# Altium PCB Prijemnik.PcbDoc
Units mm, origin at the board's own origin, x right, y up, seen from the top; angles counter-clockwise.
Board outline 152.4 x 101.6 mm, 2 copper layers (Top Layer, Bottom Layer); 40 components, 33 nets, 155 pads, 14 vias.
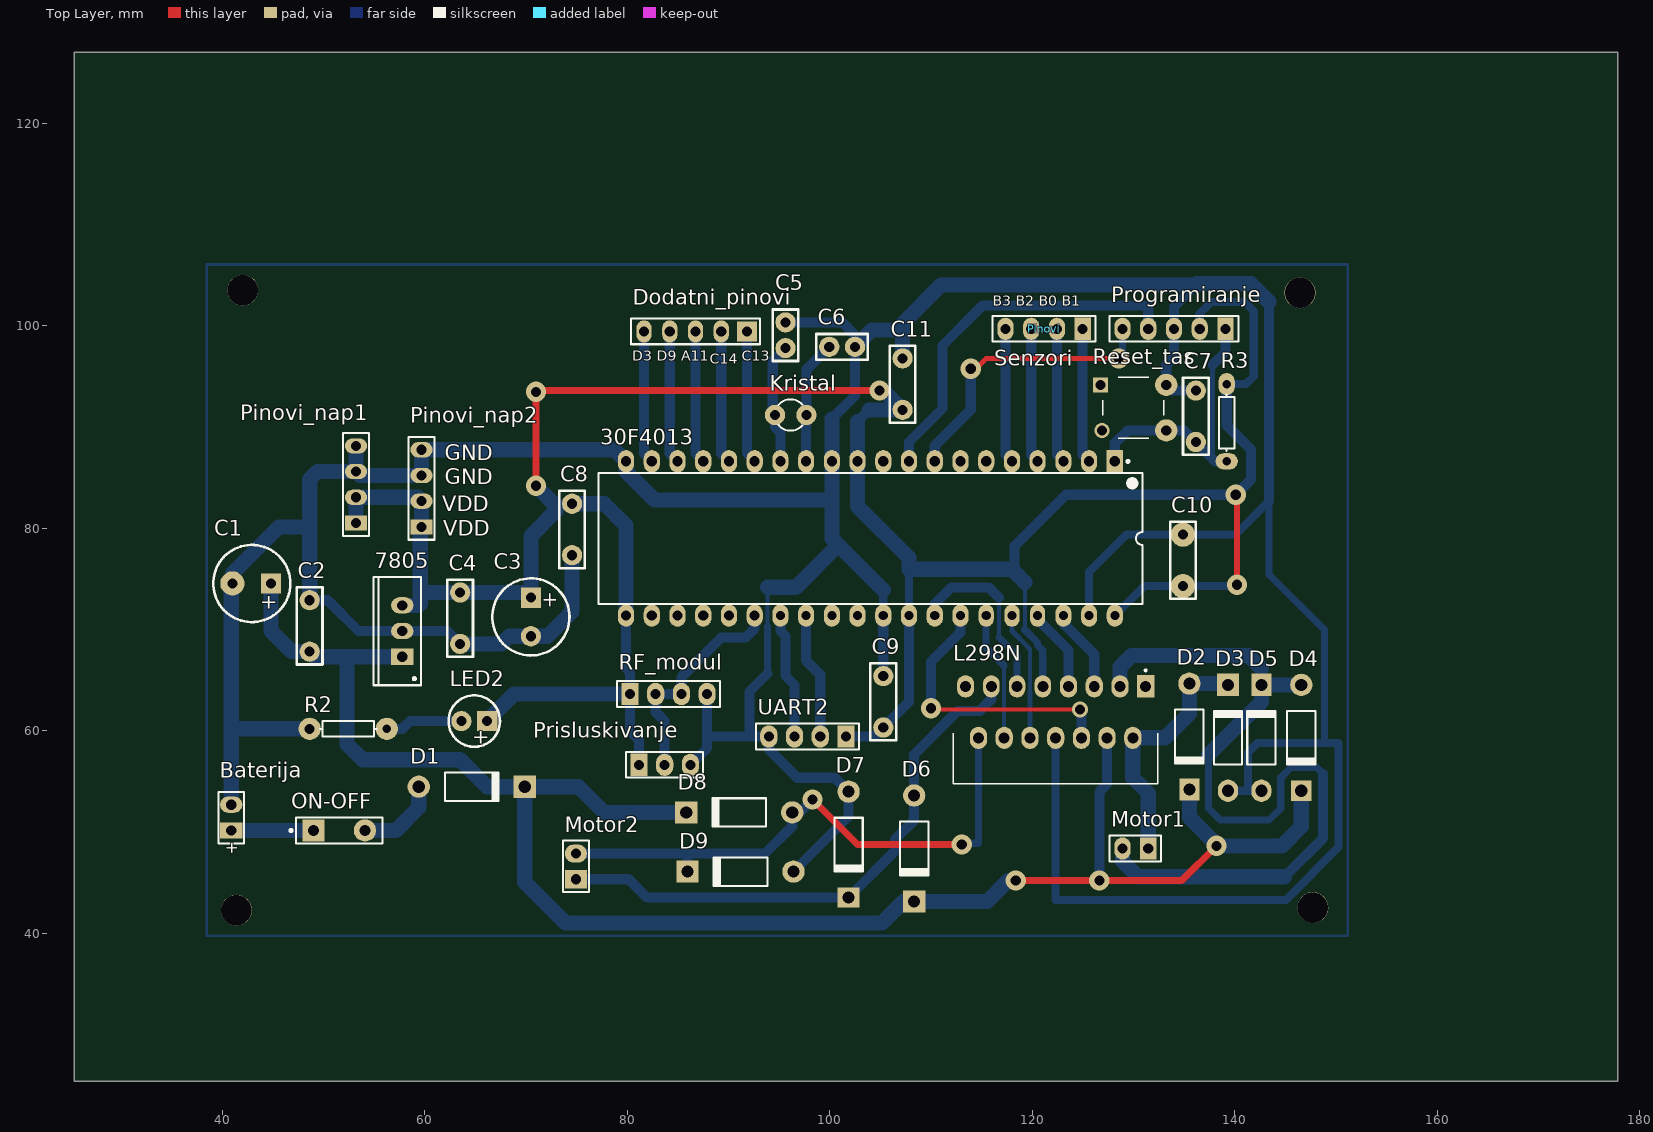
[diagram p0: Top Layer view]
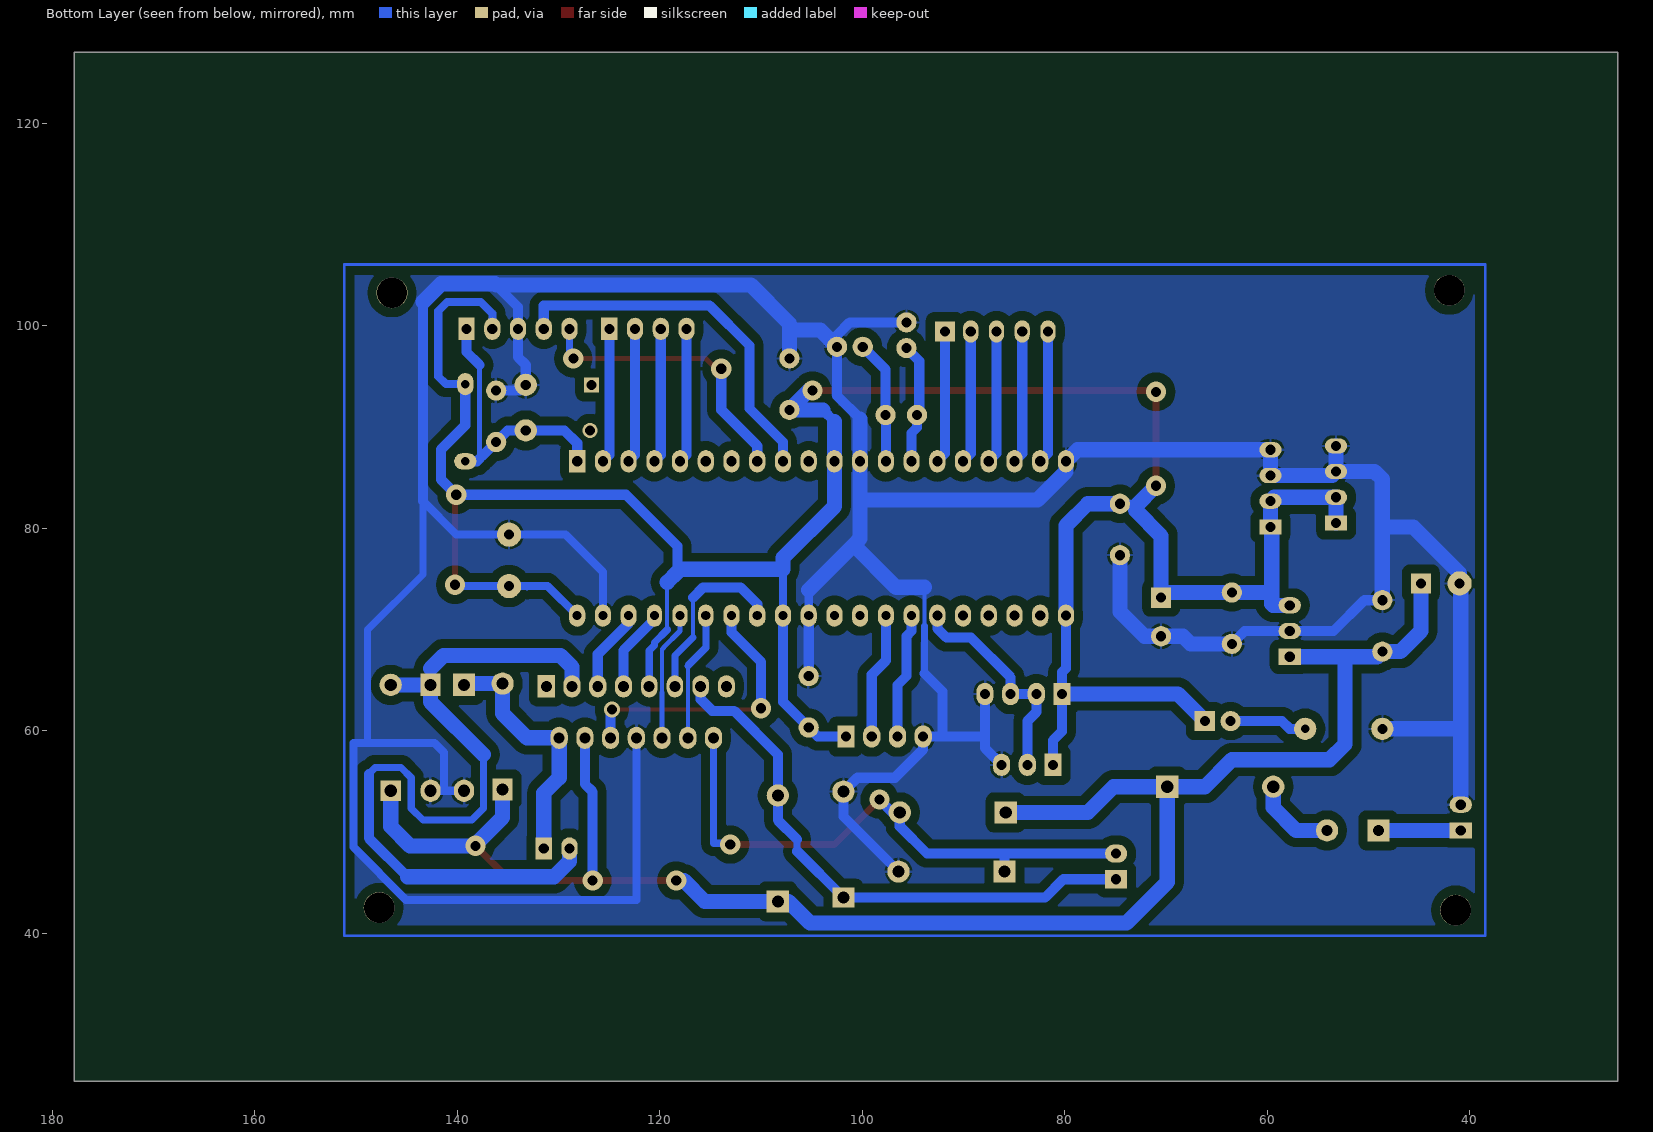
[diagram p1: Bottom Layer view, seen from below]

## Layer stack, top to bottom
Top Solder: solder mask 0.0102, Solder Resist, Dk 3.5
Top Layer: signal copper 0.0356
Dielectric 1: dielectric 0.32, FR-4, Dk 4.8
Bottom Layer: signal copper 0.0356
Bottom Solder: solder mask 0.0102, Solder Resist, Dk 3.5

## Board outline
25.4,25.4 177.8,25.4 177.8,127 25.4,127

## Design rules (kind name [scope] priority, off if disabled: settings)
Clearance [All vs InPolygon] p1: gap=0.9 ignorepadtopadclearanceinfootprint=FALSE
PolygonConnect [All] p1: connectstyle=Relief reliefconductorwidth=0.254 reliefentries=4 polygonreliefangle="90 Angle" airgapwidth=0.254
RoutingVias [All] p1: holewidth=0.711 width=1.27 viastyle="Through Hole" minholewidth=0.711 minwidth=1.27 maxholewidth=0.711 maxwidth=1.27
SolderMaskExpansion [All] p1: expansion=0.102
Width Signali [InNetClass('Ostali Signali')] p1: maxlimit=1 minlimit=0.3 preferedwidth=0.8
Width VDD [InNetClass('VDD i GND')] p2: maxlimit=1.5 minlimit=0.4 preferedwidth=1
Width Motor [InNetClass('Napajanje_motora')] p3: maxlimit=2 minlimit=0.4 preferedwidth=1
30 further rules are at their usual default settings.

## Classes and differential pairs
net class Napajanje_motora: NetBaterija_1 NetD1_1 NetD2_1 NetD4_1 NetD6_1 NetD8_1 V_motora
net class "VDD i GND": GND VDD
net class "Ostali Signali": MCLR Net30F4013_33 Net30F4013_34 NetLED2_2 OSC1 OSC2 PGC PGD RA11 RB0 RB1 RB2 RB3 RB9 RB10 RB11 RB12 RC13 RC14 RD3 RD9 RF4 RF5 U1RX/RF2

## Components (designator, comment, footprint, x,y, rotation, side; value= is the part's Value field where it differs from the comment)
30F4013 "DSPIC30F4013-20E/P" PDIP600-P40 104.013,78.994 r270 top
7805 "LM7805CT" T03B 57.785,69.85 r90 top
Baterija "9V" BAT-2 40.894,51.435 r90 top
C1 "470uF" "El. Kondenzator 470uf"#1 42.926,74.549 r180 top
C2 "100nF" "C blok 100n"#1 48.641,70.358 r90 top
C3 "470uF" "El. Kondenzator 470uf"#2 70.485,71.247 r270 top
C4 "100nF" "C blok 100n"#1 63.5,71.12 r270 top
C5 "33pF" "C keramicki 30pF" 95.631,99.06 r270 top
C6 "33pF" "C keramicki 30pF" 101.219,97.917 r180 top
C7 "100nF" "C blok 100n"#1 136.144,91.059 r90 top
C8 "100nF" "C blok 100n"#1 74.549,79.883 r270 top
C9 "100nF" "C blok 100n"#1 105.283,62.865 r90 top
C10 "100nF" "C blok 100n"#2 134.874,76.835 r90 top
C11 "100nF" "C blok 100n"#1 107.188,94.234 r90 top
D1 "1N4007" DO-41#1 64.643,54.483 r0 top
D2 "Diode 1N4007" DO-41#2 135.509,59.436 r270 top
D3 "Diode 1N4007" DO-41#3 139.319,59.309 r90 top
D4 "Diode 1N4007" DO-41#4 146.558,59.309 r270 top
D5 "Diode 1N4007" DO-41#5 142.621,59.309 r90 top
D6 "Diode 1N4007" DO-41#1 108.331,48.387 r270 top
D7 "Diode 1N4007" DO-41#6 101.854,48.768 r270 top
D8 "Diode 1N4007" DO-41#1 91.059,51.943 r180 top
D9 "Diode 1N4007" DO-41#1 91.186,46.101 r180 top
Dodatni_pinovi "Pinovi" HDR1X5#1 91.821,99.441 r180 top
Kristal "10MHz" R38 96.139,91.186 r270 top
L298N "L298N" *TO127P2020X500X2100-15 131.191,64.389 r270 top
LED2 "LED_regulatora" LED_5mm 64.897,60.96 r180 top
Motor1 "M1" HDR1X2#1 131.445,48.387 r180 top
Motor2 "M2" HDR1X2#2 74.93,45.339 r90 top
ON-OFF "Prekidac" SPST-2 51.562,50.165 r0 top
Pinovi "Senzori" HDR1X4#1 124.968,99.695 r180 top
Pinovi_nap1 "Napajanje" HDR1X4#2 53.213,80.518 r90 top
Pinovi_nap2 "Napajanje" HDR1X4#2 59.69,80.137 r90 top
Prisluskivanje "Rx_na_Rx_MAX-a" HDR1X3 81.153,56.642 r0 top
Programiranje "Pinovi" HDR1X5#2 139.065,99.695 r180 top
R2 "660" AXIAL-0.3#1 52.451,60.198 r0 top
R3 "10k" AXIAL-0.3#2 139.192,90.424 r90 top value=10K
Reset_tas "3-1825910-1" *TE_3-1825910-1 129.973,91.912 r0 top
RF_modul "Prijem" HDR1X4#3 80.264,63.627 r0 top
UART2 "Bluetooth" HDR1X4#4 101.6,59.436 r180 top

## Footprints (in the part's own frame and the unit in brackets; to place one, negate y for a bottom-side part, rotate by r counter-clockwise, add the part's x,y. Pads: shape width x height; smd on the part's side, far side on the other; paste and mask are expansions set on the pad)
*TE_3-1825910-1 [mm]
  rect 1.498x1.498 hole 0.99: 1(-3.25,2.25)
  round 2.2 hole 1: 2(3.25,2.25) 4(3.25,-2.25)
  round 1.498 hole 0.99: 3(-3.1,-2.25)
  silkscreen extent -3,-3 3,3
*TO127P2020X500X2100-15 [mm]
  rect 2.2x1.7 hole 1.08: 1(0,0)
  oval 2.2x1.7 hole 1.08: 2(5.08,-1.27) 3(0,-2.54) 4(5.08,-3.81) 5(0,-5.08) 6(5.08,-6.35) 7(0,-7.62) 8(5.08,-8.89) 10(5.08,-11.43) 12(5.08,-13.97) 14(5.08,-16.51) 15(0,-17.78)
  oval 2.2x1.62 hole 1.08: 9(0,-10.16) 11(0,-12.7) 13(0,-15.24)
  silkscreen extent -1.69,-18.99 9.63,1.21
AXIAL-0.3#1 [mm] "Axial Device, Thru-Hole; 2 Leads; 0.3 in Pin Spacing"
  round 2.2 hole 1: 1(-3.81,0)
  round 2.2 hole 0.85: 2(3.81,0)
  silkscreen extent -2.77,-0.76 2.77,0.76
AXIAL-0.3#2 [mm] "Axial Device, Thru-Hole; 2 Leads; 0.3 in Pin Spacing"
  oval 1.6x2.2 hole 0.85: 1(-3.81,0)
  oval 2.2x1.6 hole 0.85: 2(3.81,0)
  silkscreen extent -2.77,-0.76 2.77,0.76
BAT-2 [mm] "Battery; 2 Leads"
  rect 1.6x2.2 hole 1: 1(-1.27,0)
  oval 1.6x2.2 hole 1: 2(1.27,0)
  silkscreen extent -2.54,-1.27 2.54,1.27
"C blok 100n"#1 [mm]
  round 2 hole 1: 1(2.54,0) 2(-2.54,0)
  silkscreen extent -3.81,-1.27 3.81,1.27
"C blok 100n"#2 [mm]
  round 2.4 hole 1: 1(2.54,0) 2(-2.54,0)
  silkscreen extent -3.81,-1.27 3.81,1.27
"C keramicki 30pF" [mm]
  round 2 hole 1: 1(-1.27,0) 2(1.27,0)
  silkscreen extent -2.54,-1.27 2.54,1.27
DO-41#1 [mm] "Diode, Axial; Body 5.2 x 2.7 mm (LxDia. max), Lead Dia. 0.86 mm (max)"
  round 2.2 hole 1.2: 1(-5.23,0)
  rect 2.2x2.2 hole 1.2: 2(5.23,0)
  silkscreen extent -2.65,-1.4 2.75,1.4
DO-41#2 [mm] "Diode, Axial; Body 5.2 x 2.7 mm (LxDia. max), Lead Dia. 0.86 mm (max)"
  round 2.2 hole 1.2: 1(-5.23,0)
  rect 2.2x2 hole 1.2: 2(5.23,0)
  silkscreen extent -2.65,-1.4 2.75,1.4
DO-41#3 [mm] "Diode, Axial; Body 5.2 x 2.7 mm (LxDia. max), Lead Dia. 0.86 mm (max)"
  oval 2.2x2 hole 1.2: 1(-5.23,0)
  rect 2.2x2.2 hole 1.2: 2(5.23,0)
  silkscreen extent -2.65,-1.4 2.75,1.4
DO-41#4 [mm] "Diode, Axial; Body 5.2 x 2.7 mm (LxDia. max), Lead Dia. 0.86 mm (max)"
  round 2.2 hole 1.2: 1(-5.23,0)
  rect 2x2 hole 1.2: 2(5.23,0)
  silkscreen extent -2.65,-1.4 2.75,1.4
DO-41#5 [mm] "Diode, Axial; Body 5.2 x 2.7 mm (LxDia. max), Lead Dia. 0.86 mm (max)"
  oval 2.2x2 hole 1.2: 1(-5.23,0)
  rect 2.2x2 hole 1.2: 2(5.23,0)
  silkscreen extent -2.65,-1.4 2.75,1.4
DO-41#6 [mm] "Diode, Axial; Body 5.2 x 2.7 mm (LxDia. max), Lead Dia. 0.86 mm (max)"
  round 2.2 hole 1.2: 1(-5.23,0)
  rect 2x2.2 hole 1.2: 2(5.23,0)
  silkscreen extent -2.65,-1.4 2.75,1.4
"El. Kondenzator 470uf"#1 [mm]
  rect 2x2 hole 1: 1(-1.905,0)
  round 2.4 hole 1: 2(1.905,0)
  silkscreen extent -3.81,-3.81 3.81,3.81
"El. Kondenzator 470uf"#2 [mm]
  rect 2x2 hole 1: 1(-1.905,0)
  round 2 hole 1: 2(1.905,0)
  silkscreen extent -3.81,-3.81 3.81,3.81
HDR1X2#1 [mm] "Connector; Header; 2 Position"
  rect 1.6x2.2 hole 1: 1(0,0)
  oval 1.6x2.2 hole 1: 2(2.54,0)
  silkscreen extent -1.27,-1.27 3.81,1.27
HDR1X2#2 [mm] "Connector; Header; 2 Position"
  rect 1.8x2.2 hole 1: 1(0,0)
  oval 1.8x2.2 hole 1: 2(2.54,0)
  silkscreen extent -1.27,-1.27 3.81,1.27
HDR1X3 [mm] "Connector; Header; 3 Position"
  rect 1.7x2.2 hole 1 unplated: 1(0,0)
  oval 1.7x2.2 hole 1 unplated: 2(2.54,0) 3(5.08,0)
  silkscreen extent -1.27,-1.27 6.35,1.27
HDR1X4#1 [mm] "Connector; Header; 4 Position"
  rect 1.6x2.2 hole 1: 1(0,0)
  oval 1.6x2.2 hole 1: 2(2.54,0) 3(5.08,0) 4(7.62,0)
  silkscreen extent -1.27,-1.27 8.89,1.27
HDR1X4#2 [mm] "Connector; Header; 4 Position"
  rect 1.5x2.2 hole 1: 1(0,0)
  oval 1.5x2.2 hole 1: 2(2.54,0) 3(5.08,0) 4(7.62,0)
  silkscreen extent -1.27,-1.27 8.89,1.27
HDR1X4#3 [mm] "Connector; Header; 4 Position"
  rect 1.7x2.2 hole 1 unplated: 1(0,0)
  oval 1.7x2.2 hole 1 unplated: 2(2.54,0) 3(5.08,0) 4(7.62,0)
  silkscreen extent -1.27,-1.27 8.89,1.27
HDR1X4#4 [mm] "Connector; Header; 4 Position"
  rect 1.7x2.2 hole 1: 1(0,0)
  oval 1.7x2.2 hole 1: 2(2.54,0) 3(5.08,0) 4(7.62,0)
  silkscreen extent -1.27,-1.27 8.89,1.27
HDR1X5#1 [mm] "Connector; Header; 5 Position"
  rect 2x2 hole 1: 1(0,0)
  oval 1.5x2.2 hole 1: 2(2.54,0) 3(5.08,0) 4(7.62,0) 5(10.16,0)
  silkscreen extent -1.27,-1.27 11.43,1.27
HDR1X5#2 [mm] "Connector; Header; 5 Position"
  rect 1.6x2.2 hole 1: 1(0,0)
  oval 1.6x2.2 hole 1: 2(2.54,0) 3(5.08,0) 4(7.62,0) 5(10.16,0)
  silkscreen extent -1.27,-1.27 11.43,1.27
LED_5mm [mm]
  rect 2x2 hole 1: 1(-1.27,0)
  round 2 hole 1: 2(1.27,0)
  silkscreen extent -2.54,-2.54 2.54,2.54
PDIP600-P40 [mm] "DIP, 40-Leads, Row Spacing 15.24mm, Pitch 2.54mm, Body 51.8x13.5mm"
  rect 2.2x1.6 hole 1: 1(-7.62,24.13)
  oval 2.2x1.6 hole 1: 2(-7.62,21.59) 3(-7.62,19.05) 4(-7.62,16.51) 5(-7.62,13.97) 6(-7.62,11.43) 7(-7.62,8.89) 8(-7.62,6.35) 9(-7.62,3.81) 10(-7.62,1.27) 11(-7.62,-1.27) 12(-7.62,-3.81) 13(-7.62,-6.35) 14(-7.62,-8.89) 15(-7.62,-11.43) 16(-7.62,-13.97) 17(-7.62,-16.51) 18(-7.62,-19.05) 19(-7.62,-21.59) 20(-7.62,-24.13) 21(7.62,-24.13) 22(7.62,-21.59) 23(7.62,-19.05) 24(7.62,-16.51) 25(7.62,-13.97) 26(7.62,-11.43)
  oval 2.2x1.6 hole 0.9: 27(7.62,-8.89) 28(7.62,-6.35) 29(7.62,-3.81) 30(7.62,-1.27) 31(7.62,1.27) 32(7.62,3.81) 33(7.62,6.35) 34(7.62,8.89) 38(7.62,19.05) 39(7.62,21.59) 40(7.62,24.13)
  oval 2.2x1.5 hole 0.9: 35(7.62,11.43) 36(7.62,13.97) 37(7.62,16.51)
  silkscreen extent -7.74,-26.85 6.45,26.85, body extent -7.3,-26.85 7.3,26.85, height 6.35
R38 [mm] "Crystal, Thru-Hole; 2 Leads; Body 3.1 x 8.2 mm (Dia.xH)"
  round 2 hole 1: 1(0,1.55) 2(0,-1.55)
  silkscreen extent -1.55,-1.19 1.55,1.17
SPST-2 [mm] "Switch; 2 Leads"
  rect 2.2x2.2 hole 1.1: 1(-2.54,0)
  round 2.2 hole 1.1: 2(2.54,0)
  silkscreen extent -4.89,-1.27 4.28,1.27
T03B [mm] "TO, Thru-Hole, Vertical, Heatsink Mounted; 3 In-Line Leads; Pitch 2.54 mm"
  rect 1.6x2.2 hole 1: 1(-2.54,0)
  oval 1.6x2.2 hole 1: 2(0,0) 3(2.54,0)
  silkscreen extent -5.35,-1.85 5.35,2.85, body extent -5.4,-1.9 5.4,2.9, height 19.4

## Part data
30F4013: "High-Performance 16-bit Digital Signal Controller, 48 KB Flash, 2 KB SRAM, 1 KB EEPROM, 40-Pin PDIP, Extended High Temperature", Supplier Part Number 1=DSPIC30F4013-20EP-ND, ComponentLink1Description=Datasheet, ComponentLink1URL=http://ww1.microchip.com/downloads/en/DeviceDoc/70138F.pdf, ComponentLink2Description="Packaging Specification", ComponentLink2URL=http://www.microchip.com/stellent/groups/techpub_sg/documents/packagingspec/en012702.pdf, ComponentLink3Description="Microchip.com Home", ComponentLink3URL=http://www.microchip.com/, DatasheetVersion="revF, Apr-2008", PackageDescription="40-Lead Plastic Dual In-Line (P) - 600 mil Body [PDIP]", PackageReference=PDIP600-P40, PackageVersion="revBB, Aug-2009", Published=29-Jan-2009, Publisher="Altium Limited", Supplier 1=Digi-Key
7805: library part LM7905CT, "3-Terminal Negative Regulator, 3-pin TO-220", Manufacturer="National Semiconductor", PackageTopMarking=NSUZXYTTE#*LM7905CT, PowerWise=N, Supplier Part Number 1=9490370, ComponentLink1Description="LM7905 Datasheet", ComponentLink1URL=http://www.national.com/ds/LM/LM7905.pdf, ComponentLink2Description="LM7905 Web Page", ComponentLink2URL=http://www.national.com/pf/LM/LM7905.html, ComponentLink3Description="T03B Package Page", ComponentLink3URL=http://www.national.com/packaging/folders/t03b.html, CompType="LDO IC", DatasheetVersion=Sep-2001, PackageDescription="TO-220, Molded, 3 Lead, Straight", PackageReference=T03B, PackageVersion="revL, Jan-1992", PartNumber=LM7905CT, PinCount=3, Published=4-Dec-2008, Publisher="Altium Limited", RoHS=N, Supplier 1=Farnell
Baterija: library part Battery, "Multicell Battery", LatestRevisionDate=17-Jul-2002, LatestRevisionNote="Re-released for DXP Platform.", PackageDescription="Battery; 2 Leads", PackageReference=BAT-2, Published=24-Mar-1999, Publisher="Altium Limited"
C1 C3: library part "Cap Pol1", "Polarized Capacitor (Radial)", LatestRevisionDate=17-Jul-2002, LatestRevisionNote="Re-released for DXP Platform.", PackageDescription="Polarized Capacitor (Radial); 2 Leads", PackageReference=RB7.6-15, Published=8-Jun-2000, Publisher="Altium Limited"
C2 C4 C5 C6 C7 C8 C9 C10 C11: library part Cap, "Capacitor", LatestRevisionDate=17-Jul-2002, LatestRevisionNote="Re-released for DXP Platform.", PackageDescription="Radial Cap, Thru-Hole; 2 Leads; 0.3 in Pin Spacing", PackageReference=RAD-0.3, Published=8-Jun-2000, Publisher="Altium Limited"
D1: library part "Diode 1N4007", "1 Amp General Purpose Rectifier", Code_JEDEC=DO-204-AL, ComponentLink1Description="Manufacturer Link", ComponentLink1URL=http://www.fairchildsemi.com/, ComponentLink2Description=Datasheet, ComponentLink2URL=http://www.fairchildsemi.com/ds/1N%2F1N4001.pdf, DatasheetVersion=1998, LatestRevisionDate=17-Jul-2002, LatestRevisionNote="Re-released for DXP Platform.", PackageDescription="Diode, Axial; Body 5.2 x 2.7 mm (LxDia. max), Lead Dia. 0.86 mm (max)", PackageReference=DO-41, PackageVersion=Aug-1999, Published=8-Jun-2000, Publisher="Altium Limited"
D2 D3 D4 D5 D6 D7 D8 D9: "1 Amp General Purpose Rectifier", Code_JEDEC=DO-204-AL, ComponentLink1Description="Manufacturer Link", ComponentLink1URL=http://www.fairchildsemi.com/, ComponentLink2Description=Datasheet, ComponentLink2URL=http://www.fairchildsemi.com/ds/1N%2F1N4001.pdf, DatasheetVersion=1998, LatestRevisionDate=17-Jul-2002, LatestRevisionNote="Re-released for DXP Platform.", PackageDescription="Diode, Axial; Body 5.2 x 2.7 mm (LxDia. max), Lead Dia. 0.86 mm (max)", PackageReference=DO-41, PackageVersion=Aug-1999, Published=8-Jun-2000, Publisher="Altium Limited"
Dodatni_pinovi Programiranje: library part "Header 5", "Header, 5-Pin", LatestRevisionDate=17-Jul-2002, LatestRevisionNote="Re-released for DXP Platform.", Publisher="Altium Limited"
Kristal: library part XTAL, "Crystal Oscillator", LatestRevisionDate=17-Jul-2002, LatestRevisionNote="Re-released for DXP Platform.", PackageDescription="Crystal, Thru-Hole; 2 Leads; Body 3.1 x 8.2 mm (Dia.xH)", PackageReference=R38, Published=8-Jun-2000, Publisher="Altium Limited"
L298N: "Half Bridge _4_ Driver DC Motors, Relays, Solenoids, Stepper Motors Bipolar 15-Multiwatt", Package="Multiwatt-15 STMicroelectronics", Availability=Unavailable, MF=STMicroelectronics, MP=L298N, Price=None, SnapEDA_Link=https://www.snapeda.com/parts/L298N/STMicroelectronics/view-part/294022/?ref=snap
LED2: library part LED1, "Typical RED GaAs LED", LatestRevisionDate=08-Jul-2005, LatestRevisionNote="Mech Layer 1 removed.", PackageDescription="LED; 2 Leads", PackageReference=LED-1, Published=8-Jun-2000, Publisher="Altium Limited"
Motor1 Motor2: library part "Header 2", "Header, 2-Pin", LatestRevisionDate=17-Jul-2002, LatestRevisionNote="Re-released for DXP Platform.", Publisher="Altium Limited"
ON-OFF: library part SW-PB, "Switch", LatestRevisionDate=17-Jul-2002, LatestRevisionNote="Re-released for DXP Platform.", PackageDescription="Switch; 2 Leads", PackageReference=SPST-2, Published=24-Mar-1999, Publisher="Altium Limited"
Pinovi Pinovi_nap1 Pinovi_nap2 Prisluskivanje RF_modul UART2: library part "Header 4", "Header, 4-Pin", LatestRevisionDate=17-Jul-2002, LatestRevisionNote="Re-released for DXP Platform.", Publisher="Altium Limited"
R2 R3: library part Res1, "Resistor", LatestRevisionDate=17-Jul-2002, LatestRevisionNote="Re-released for DXP Platform.", PackageDescription="Axial Device, Thru-Hole; 2 Leads; 0.3 in Pin Spacing", PackageReference=AXIAL-0.3, Published=8-Jun-2000, Publisher="Altium Limited"
Reset_tas: "Switch Push Button OFF _ON_ SPST Round Button 0.05A 24VDC Momentary Contact PC Pins Thru-Hole", Package=None, Availability=Unavailable, EU_RoHS_Compliance=Compliant, MF="TE Connectivity", MP=3-1825910-1, Price=None, SnapEDA_Link=https://www.snapeda.com/parts/3-1825910-1/TE%20Connectivity%20ALCOSWITCH%20Switches/view-part/452461/?ref=snap, TE_purchase_URL=https://www.te.com/usa-en/product-3-1825910-1.html?te_bu=Cor&te_type=disp&te_campaign=seda_glo_cor-seda-global-disp-prtnr-fy19-seda-model-bom-cta_sma-317_1&elqCampaignId=32493

## Free pads (board coordinates)
  round 3.05 hole 3: 2(146.431,103.251) 3(42.037,103.505) 4(41.402,42.291) 5(147.701,42.545)

## Via types
v1: diameter 2, hole 1, Top Layer to Bottom Layer, 13 vias
v2: diameter 1.6, hole 1, Top Layer to Bottom Layer, 1 vias

## Nets (pads, with @x,y where several pads share a name; then routed paths per layer and width w, separated by ;. In a path a pad name is that pad's centre, name@x,y a point inside that pad or via, vN(x,y) a via of type N, cw(c..) or ccw(c..) an arc to the next point about the centre after c; other vN are vias at no path point)
GND: 30F4013.12 30F4013.20 30F4013.31 30F4013.39 7805.2 Baterija.2 C1.2 C2.1 C3.2 C4.1 C5.1 C6.1 C7.1 C8.1 C9.1 C10.1 C11.1 D3.1 D5.1 D7.1 D9.1 L298N.8 Pinovi_nap1.3 Pinovi_nap1.4 Pinovi_nap2.3 Pinovi_nap2.4 Prisluskivanje.3 Programiranje.3 R2.1 Reset_tas.2 RF_modul.4 UART2.4 | length 455.5
  Bottom Layer w0.4: 93.853,70.358 93.853,74.168
  Bottom Layer w0.6: 87.884,59.563 88.011,59.436
  Bottom Layer w0.7: C1.2 C1.2@41.021,75.565 ; 93.853,65.659 93.853,70.358 ; 143.383,82.677 143.383,75.438 148.844,69.977 148.844,58.801
  Bottom Layer w0.8: C1.2@40.894,74.422 C1.2 ; 30F4013.31 105.283,73.914 ; 106.299,99.568 106.299,99.314 107.188,100.203 ; L298N.8 122.301,43.307 145.034,43.307 150.241,48.514 150.241,58.801 148.844,58.801 142.24,58.801 141.287,57.848 141.287,54.079 ; 30F4013.39 125.603,75.692 129.286,79.375 C10.1 140.081,79.375 143.383,82.677 ; 136.144,104.013 136.271,104.14 ; D3.1 141.287,54.079 ; D5.1 141.287,54.079
  Bottom Layer w1: 40.894,59.944 41.148,60.198 ; C2.1 50.419,72.898 53.467,69.85 7805.2 62.23,69.85 C4.1 ; Prisluskivanje.3 87.884,58.293 87.884,59.563 RF_modul.4 ; 88.011,59.436 92.075,59.436 ; 93.853,65.659 92.075,63.881 92.075,59.436 ; C5.1 101.219,100.33 102.489,99.06 C6.1 102.489,93.091 100.203,90.805 ; D9.1 101.854,51.539 D7.1 100.48,55.372 96.774,55.372 93.98,58.166 UART2.4 92.075,59.436 ; C9.1 30F4013.31 ; 107.188,100.203 107.379,100.393 ; C7.1 133.786,93.599 Reset_tas.2 133.223,96.139 133.985,96.901 Programiranje.3 133.985,101.854 136.144,104.013 ; 143.383,82.677 143.383,102.362
  Bottom Layer w1.5: Baterija.2 40.894,59.944 C1.2@40.894,74.422 ; C1.2@41.021,75.565 45.593,80.137 48.641,80.137 ; 41.148,60.198 R2.1 ; C2.1 48.641,80.137 ; Pinovi_nap1.4 Pinovi_nap1.3 ; C4.1 67.564,68.58 68.326,69.342 C3.2 72.136,69.342 74.549,71.755 C8.1 ; 93.853,74.168 96.647,74.168 100.838,78.359 ; 100.203,90.805 30F4013.12 100.203,82.804 ; C6.1 104.14,99.568 106.299,99.568 ; 105.283,73.914 100.838,78.359 ; C11.1 107.188,100.203 ; 107.379,100.393 110.998,104.013 136.144,104.013 ; 136.271,104.14 141.605,104.14 143.383,102.362 ; 48.641,80.137 48.641,84.836 49.403,85.598 Pinovi_nap1.3 ; Pinovi_nap1.3 53.594,85.217 Pinovi_nap2.3 Pinovi_nap2.4 78.74,87.757 30F4013.20 79.883,85.598 82.677,82.804 100.203,82.804 ; 100.203,82.804 100.203,78.994 100.838,78.359
MCLR: 30F4013.1 C7.2 Programiranje.1 R3.1 Reset_tas.4 | length 27.6
  Bottom Layer w0.5: 137.795,86.868 137.795,96.139
  Bottom Layer w1: 30F4013.1 128.143,88.392 129.413,89.662 Reset_tas.4 135.001,89.662 C7.2 137.541,87.122 ; 137.795,86.868 138.049,86.614 R3.1 ; 137.795,96.139 139.065,97.409 Programiranje.1
Net30F4013_33: 30F4013.33 L298N.11 | length 18.1
  Bottom Layer w0.4: 116.713,69.215 116.713,73.152
  Bottom Layer w0.7: 116.713,69.215 118.491,67.437 L298N.11
  Bottom Layer w1: 30F4013.33 110.363,72.517 112.014,74.168 115.697,74.168 116.713,73.152
Net30F4013_34: 30F4013.34 L298N.6 | length 28
  Top Layer w0.4: v1(109.982,62.23) 110.109,62.103 v2(124.714,62.103)
  Bottom Layer w0.4: v2(124.714,62.103) v2@124.841,61.976
  Bottom Layer w1: v1(109.982,62.23) 109.982,66.802 112.903,69.723 30F4013.34 ; L298N.6 v2@124.841,61.976
NetBaterija_1: Baterija.1 ON-OFF.1 | length 8.1
  Bottom Layer w1.5: Baterija.1 ON-OFF.1
NetD1_1: D1.1 ON-OFF.2 | length 8.3
  Bottom Layer w1.5: ON-OFF.2 57.15,50.165 59.413,52.428 D1.1
NetD2_1: D2.1 D3.2 L298N.2 Motor1.1 | length 24.9
  Bottom Layer w0.7: D3.2@139.192,64.666 D3.2
  Bottom Layer w1.5: Motor1.1 131.445,53.848 129.921,55.372 L298N.2 133.096,59.309 135.509,61.722 D2.1 D3.2@139.192,64.666
NetD4_1: D4.1 D5.2 L298N.3 Motor1.2 | length 82.4
  Bottom Layer w0.7: 137.414,57.658 137.414,52.324 138.557,51.181 143.383,51.181 144.526,52.324 144.526,55.372 145.542,56.388 148.082,56.388 148.717,55.753
  Bottom Layer w1: D5.2 142.621,66.167 ; 144.907,45.593 148.717,49.403 148.717,55.753
  Bottom Layer w1.5: L298N.3 128.651,66.294 129.794,67.437 141.351,67.437 142.621,66.167 ; Motor1.2 128.905,47.117 130.429,45.593 144.907,45.593 ; 137.414,57.658 142.621,62.865 D5.2 D4.1
NetD6_1: D6.1 D7.2 L298N.13 Motor2.1 | length 55.6
  Bottom Layer w0.7: 106.426,48.11 106.426,49.276
  Bottom Layer w1: Motor2.1 80.137,45.339 81.938,43.538 D7.2 106.426,48.11 ; 106.426,49.276 108.331,51.181 D6.1 108.331,57.658 112.649,61.976 114.808,61.976 115.951,63.119 L298N.13
NetD8_1: D8.1 D9.2 L298N.14 Motor2.2 | length 56.9
  Top Layer w0.7: v1(98.298,53.213) 102.743,48.768 v1(113.03,48.768)
  Bottom Layer w0.7: D8.1 D8.1@97.028,51.943 ; v1(113.03,48.768) 113.157,48.895 114.681,48.895 L298N.14
  Bottom Layer w1: Motor2.2 85.956,47.879 ; D9.2 85.956,47.879 ; D8.1 96.289,50.569 93.599,47.879 85.956,47.879 ; D8.1@97.028,51.943 v1(98.298,53.213)
NetLED2_2: LED2.2 R2.2 | length 7.7
  Bottom Layer w1: R2.2 57.785,60.198 58.547,60.96 LED2.2
OSC1: 30F4013.13 C6.2 Kristal.1 | length 12.2
  Bottom Layer w0.8: Kristal.1@97.663,91.16 Kristal.1
  Bottom Layer w1: 30F4013.13 Kristal.1@97.663,91.16 ; Kristal.1 97.689,95.657 C6.2
OSC2: 30F4013.14 C5.2 Kristal.2 | length 12
  Bottom Layer w0.5: Kristal.2@94.361,91.414 Kristal.2
  Bottom Layer w1: Kristal.2@94.361,91.414 94.361,96.52 C5.2 ; Kristal.2 94.589,89.942 95.123,89.408 30F4013.14
PGC: 30F4013.8 Programiranje.5 | length 28.7
  Top Layer w0.5: v1(113.919,95.758) 114.427,95.758 115.443,96.774 v1(128.524,96.774)
  Bottom Layer w0.5: v1(128.524,96.774) v1@128.905,97.155
  Bottom Layer w0.7: v1@128.905,97.155 Programiranje.5
  Bottom Layer w1: 30F4013.8 110.363,88.138 113.919,91.694 v1(113.919,95.758)
PGD: 30F4013.9 Programiranje.4 | length 37
  Bottom Layer w1: 30F4013.9 107.823,88.519 111.125,91.821 111.125,98.044 115.062,101.981 131.445,101.981 Programiranje.4
RA11: 30F4013.17 Dodatni_pinovi.3 | length 13.1
  Bottom Layer w1: Dodatni_pinovi.3 86.741,87.376 30F4013.17
RB0: 30F4013.2 Pinovi.1 | length 13.3
  Bottom Layer w1: Pinovi.1 124.968,87.249 30F4013.2
RB1: 30F4013.3 Pinovi.2 | length 13.3
  Bottom Layer w1: Pinovi.2 122.428,87.249 30F4013.3
RB2: 30F4013.4 Pinovi.3 | length 13.3
  Bottom Layer w1: Pinovi.3 119.888,87.249 30F4013.4
RB3: 30F4013.5 Pinovi.4 | length 13.3
  Bottom Layer w1: Pinovi.4 117.348,87.249 30F4013.5
RB9: 30F4013.38 L298N.5 | length 8.2
  Bottom Layer w0.5: 30F4013.38@123.063,70.612 30F4013.38
  Bottom Layer w1: 30F4013.38@123.063,70.612 126.111,67.564 L298N.5
RB10: 30F4013.37 L298N.7 | length 8.2
  Bottom Layer w0.5: 30F4013.37@120.523,70.993 30F4013.37
  Bottom Layer w1: 30F4013.37@120.523,70.993 123.571,67.945 L298N.7
RB11: 30F4013.36 L298N.10 | length 12.8
  Bottom Layer w0.4: 119.634,68.199 119.761,68.072 119.761,63.801
  Bottom Layer w0.5: 30F4013.36 117.983,69.85 119.634,68.199 ; L298N.10 119.761,63.801
RB12: 30F4013.35 L298N.12 | length 12.8
  Bottom Layer w0.4: L298N.12 117.221,66.421
  Bottom Layer w0.7: 30F4013.35 115.443,68.199 117.221,66.421
RC13: 30F4013.15 Dodatni_pinovi.1 | length 13.1
  Bottom Layer w1: Dodatni_pinovi.1 91.821,87.376 30F4013.15
RC14: 30F4013.16 Dodatni_pinovi.2 | length 13.1
  Bottom Layer w1: Dodatni_pinovi.2 89.281,87.376 30F4013.16
RD3: 30F4013.19 Dodatni_pinovi.5 | length 13.1
  Bottom Layer w1: Dodatni_pinovi.5 81.661,87.376 30F4013.19
RD9: 30F4013.18 Dodatni_pinovi.4 | length 13.1
  Bottom Layer w1: Dodatni_pinovi.4 84.201,87.376 30F4013.18
RF4: 30F4013.28 UART2.2 | length 12.5
  Bottom Layer w1: 30F4013.28 97.663,66.929 99.06,65.532 UART2.2
RF5: 30F4013.27 UART2.3 | length 12.5
  Bottom Layer w1: 30F4013.27 95.123,69.85 95.631,69.342 95.631,65.405 96.52,64.516 UART2.3
U1RX/RF2: 30F4013.26 Prisluskivanje.2 RF_modul.2 RF_modul.3 | length 22.1
  Bottom Layer w1: Prisluskivanje.2 83.693,60.96 82.804,61.849 RF_modul.2 RF_modul.3 85.344,65.278 89.281,69.215 91.694,69.215 92.583,70.104 30F4013.26
V_motora: 7805.1 C1.1 C2.2 D1.2 D2.2 D4.2 D6.2 D8.2 L298N.4 | length 180.2
  Top Layer w0.7: v1(118.364,45.212) v1(126.619,45.212) 134.747,45.212 v1(138.176,48.641)
  Bottom Layer w0.7: C2.2 C2.2@49.149,67.31 ; D6.2@107.292,43.157 D6.2 ; v1@117.602,45.212 v1(118.364,45.212) ; v1(138.176,48.641) v1@138.176,48.768 ; D4.2@146.558,53.571 D4.2@147.066,54.079
  Bottom Layer w1: v1(126.619,45.212) 126.619,53.975 127.381,54.737 L298N.4
  Bottom Layer w1.5: C1.1 44.831,69.85 46.863,67.818 C2.2 ; C2.2@49.149,67.31 52.324,67.31 ; 7805.1 52.324,67.31 ; D8.2 77.724,51.943 75.184,54.483 D1.2 ; D6.2@107.292,43.157 105.156,41.021 73.914,41.021 69.873,45.062 D1.2 ; D6.2 115.547,43.157 v1@117.602,45.212 ; D2.2 135.509,51.435 v1@138.176,48.768 ; v1(138.176,48.641) 144.653,48.641 146.558,50.546 D4.2@146.558,53.571 ; 52.324,67.31 52.324,58.674 53.848,57.15 63.5,57.15 66.167,54.483 D1.2
VDD: 30F4013.11 30F4013.21 30F4013.32 30F4013.40 7805.3 C3.1 C4.2 C8.2 C9.2 C10.2 C11.2 L298N.9 LED2.1 Pinovi_nap1.1 Pinovi_nap1.2 Pinovi_nap2.1 Pinovi_nap2.2 Prisluskivanje.1 Programiranje.2 R3.2 RF_modul.1 UART2.1 | length 283.4
  Top Layer w0.6: v1(140.081,83.312) 140.208,83.185 v1(140.208,74.422)
  Top Layer w0.7: v1(70.993,84.201) v1(70.993,93.472) 70.866,93.599 v1(104.902,93.599)
  Bottom Layer w0.4: 119.253,69.977 119.253,74.676
  Bottom Layer w0.6: Pinovi_nap2.2@59.309,83.058 Pinovi_nap2.2 ; 59.563,73.787 59.69,73.66 ; Pinovi_nap2.1@59.563,80.01 Pinovi_nap2.1 ; C3.1@69.977,73.66 C3.1 ; C8.2@73.66,82.423 C8.2 ; 132.969,74.295 133.096,74.168 ; v1@140.081,74.295 v1(140.208,74.422)
  Bottom Layer w0.7: 73.025,81.788 73.025,82.169 ; v1(104.902,93.599) v1@105.283,93.599 ; 117.983,75.946 118.237,75.692 ; 119.253,69.977 120.523,68.707 120.523,68.453 121.031,67.945 L298N.9
  Bottom Layer w0.8: 59.436,72.39 59.563,72.517 ; 73.025,81.788 C8.2@73.66,82.423 ; 30F4013.32 107.823,75.946 ; 30F4013.40 131.064,74.295 132.969,74.295 C10.2 v1@140.081,74.295 ; Programiranje.2 136.525,101.219 137.668,102.362 140.97,102.362 141.859,101.473 141.859,94.996 141.097,94.234 R3.2
  Bottom Layer w1: 30F4013.21 79.883,66.167 80.264,65.786 RF_modul.1 80.264,59.944 81.153,59.055 Prisluskivanje.1 Prisluskivanje.1@81.026,56.769 ; UART2.1 104.394,59.436 C9.2 107.823,62.865 30F4013.32 ; 102.743,90.551 103.886,91.694 ; 118.237,75.692 118.237,78.232 123.317,83.312 v1(140.081,83.312) 141.605,84.836 141.605,87.757 139.192,90.17 R3.2
  Bottom Layer w1.5: Pinovi_nap1.1 Pinovi_nap1.2 Pinovi_nap2.2@59.309,83.058 ; 7805.3 59.436,72.39 ; 59.563,72.517 59.563,73.787 Pinovi_nap2.1@59.563,80.01 ; 59.69,73.66 C4.2 C3.1@69.977,73.66 ; Pinovi_nap2.1 Pinovi_nap2.2 ; LED2.1 68.834,63.627 RF_modul.1 ; C3.1 70.485,79.248 73.025,81.788 ; v1(70.993,84.201) 73.025,82.169 ; C8.2 77.724,82.423 79.883,80.264 30F4013.21 ; 102.743,90.551 30F4013.11 102.743,82.169 107.823,77.089 107.823,75.946 117.983,75.946 ; 103.886,91.694 C11.2 v1@105.283,93.599 ; 118.237,75.692 119.253,74.676
pads on no net: 30F4013.6 30F4013.7 30F4013.10 30F4013.22 30F4013.23 30F4013.24 30F4013.25 30F4013.29 30F4013.30 L298N.1 L298N.15 Reset_tas.1 Reset_tas.3
copper on no net: | length 357.9
  Bottom Layer w0.254: 38.481,39.751 151.13,39.751 151.13,106.045 38.481,106.045 38.481,39.751

## Polygon pours and split planes (outlines as drawn)
GND on Bottom Layer "Top Overlay-No Net" (solid, pour order 0): 38.481,106.045 151.003,106.045 151.003,40.132 151.13,40.005 150.876,39.751 38.227,39.751 38.227,106.172

## Silkscreen, mask and mechanical layers (free items; w line width, h text height)
Top Overlay:
  text "B3 B2 B0 B1" at 116.078,101.981 h1.02
  text "D3" at 80.518,96.52 h1.02
  text "D9" at 82.931,96.52 h1.02
  text "A11" at 85.344,96.52 h1.02
  text "C13" at 91.313,96.52 h1.02
  text "C14" at 88.138,96.266 h1.02
  text "GND" at 61.976,86.741 h1.52
  text "GND" at 61.976,84.328 h1.52
  text "VDD" at 61.722,81.661 h1.52
  text "VDD" at 61.849,79.248 h1.52

## Text inside footprints (layer, text, board x,y; h text height)
Baterija: Top Overlay "+" at 41.471,47.765 h1.15 r90
C1: Top Overlay "+" at 45.466,73.279 h1.52 r180
C3: Top Overlay "+" at 71.755,73.787 h1.52 r270
LED2: Top Overlay "+" at 66.421,59.944 h1.52 r180